# Altium PCB PCB.PcbDoc
Units mm, origin at the board's own origin, x right, y up, seen from the top; angles counter-clockwise.
Board outline 67.82 x 15.11 mm, 2 copper layers (Top Layer, Bottom Layer); 11 components, 6 nets, 26 pads, 0 vias.
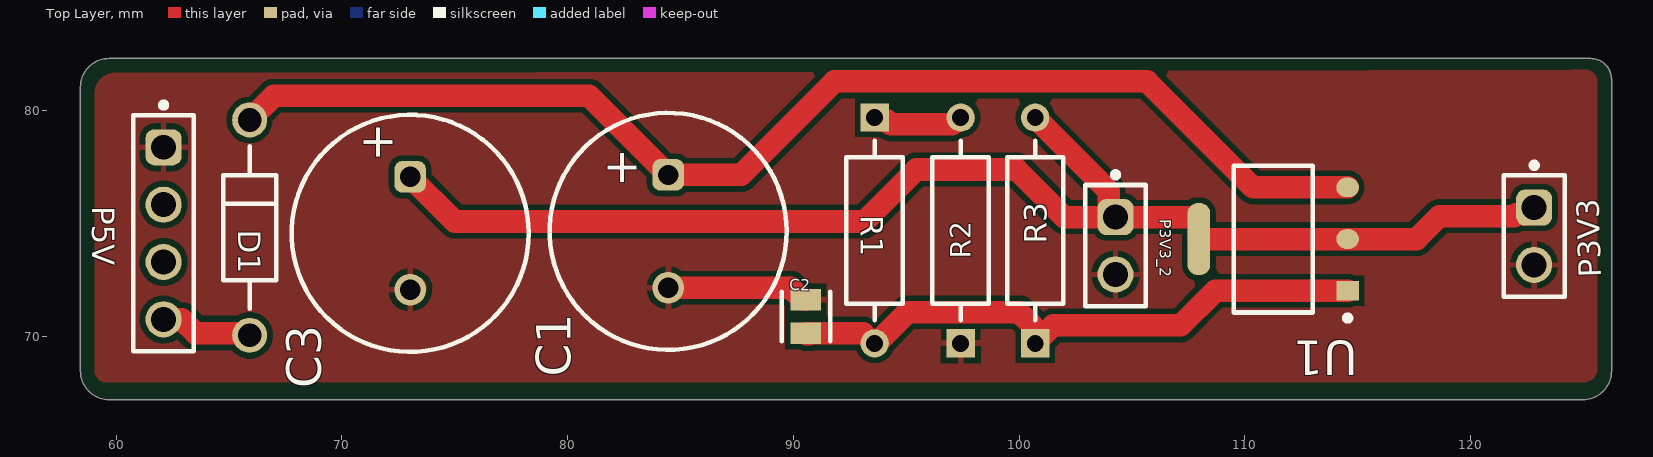
[diagram p0: Top Layer view]
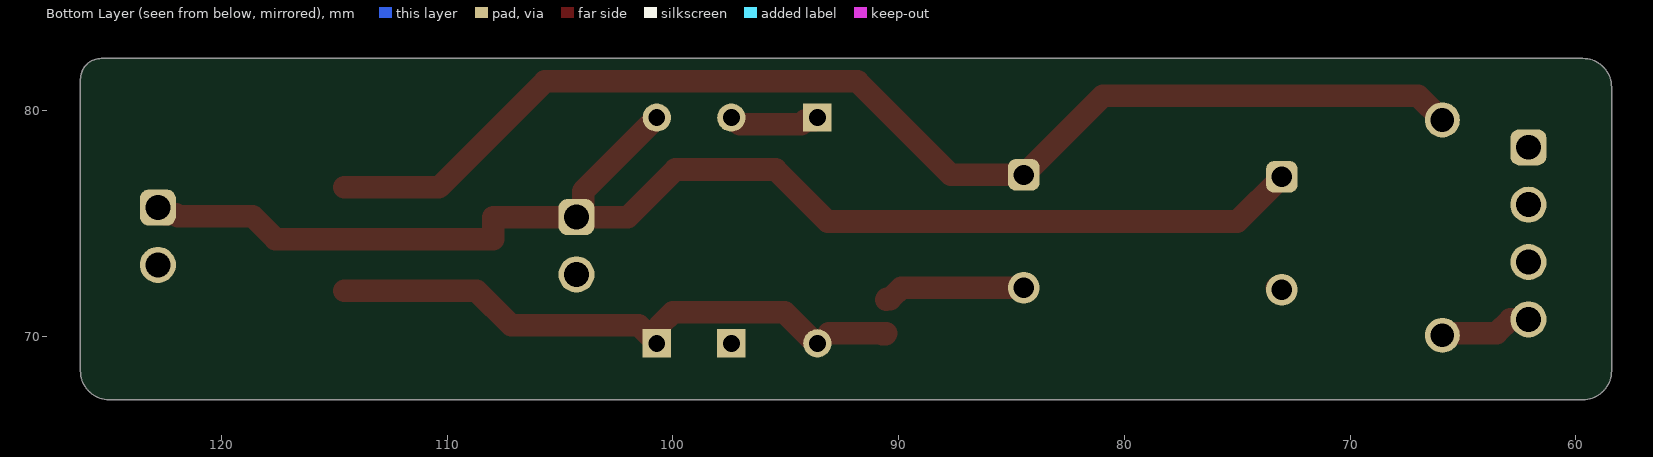
[diagram p1: Bottom Layer view, seen from below]
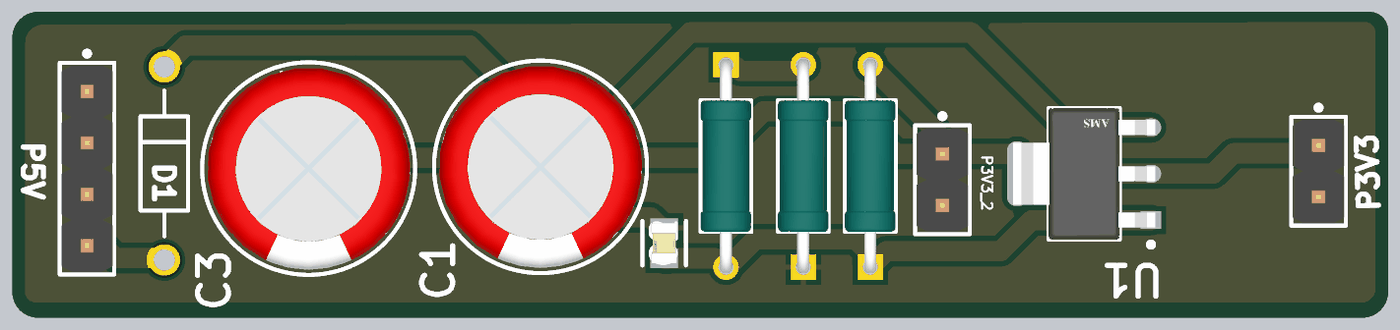
[diagram p2: 3D render of the assembled board from above, using the file's embedded part models]

## Layer stack, top to bottom
Top Solder: solder mask 0.0102, Solder Resist, Dk 3.5
Top Layer: signal copper 0.0356
Dielectric 1: dielectric 0.32, FR-4, Dk 4.8
Bottom Layer: signal copper 0.0356
Bottom Solder: solder mask 0.0102, Solder Resist, Dk 3.5

## Board outline
59.69,67.183 cw(c59.69,68.453) 58.42,68.453 58.42,81.026 cw(c59.69,81.026) 59.69,82.296 125.316,82.296 cw(c125.316,81.374) 126.238,81.374 126.238,68.453 cw(c124.968,68.453) 124.968,67.183

## Design rules (kind name [scope] priority, off if disabled: settings)
Clearance [All] p1: gap=0.254 ignorepadtopadclearanceinfootprint=FALSE
PolygonConnect [All] p1: connectstyle=Relief reliefconductorwidth=0.254 reliefentries=4 polygonreliefangle="90 Angle" airgapwidth=0.254
RoutingVias [All] p1: holewidth=0.711 width=1.27 viastyle="Through Hole" minholewidth=0.711 minwidth=1.27 maxholewidth=0.711 maxwidth=1.27
SolderMaskExpansion [All] p1: expansion=0.102 istentingtop=FALSE
SupplyNets "Schematic Supply Nets_2" [InNet('+3.3')] p1: voltage=0.000
SupplyNets "Schematic Supply Nets_1" [InNet('+5')] p2: voltage=0.000
SupplyNets "Schematic Supply Nets" [InNet('GND')] p3: voltage=0.000
Width [All] p1: maxlimit=1 minlimit=0.254 preferedwidth=0.254 minimp=50.000000 maximp=50.000000 favimp=50.000000
30 further rules are at their usual default settings.

## Components (designator, comment, footprint, x,y, rotation, side; value= is the part's Value field where it differs from the comment)
C1 "220µ" WCAP-ATUL_D10H25 84.455,74.636 r90 top locked
C2 "10nF" FP-C0805C-DN-MFG 90.551,70.866 r90 top value="10,000 pF"
C3 "220µ" WCAP-ATUL_D10H25 73.025,74.549 r90 top
D1 "1N5819RLG" ONSC-AXIAL_LEAD-2-59-10_P 65.913,74.803 r270 top
P3V3 "2.54mm" 61300211121 122.809,74.422 r270 top
P3V3_2 "2.54mm" 61300211121 104.267,74 r270 top
P5V "USB_Breakout_2.54mm" 61300411121 62.103,74.549 r270 top
R1 "510" FP-MRS25-MFG 93.599,74.676 r270 top
R2 "22" FP-MRS25-MFG 97.409,74.676 r90 top
R3 "330" FP-MRS25-MFG 100.711,74.676 r90 top
U1 "ams1117" FP-ams1117-IPC_C 111.252,74.295 r180 top

## Footprints (in the part's own frame and the unit in brackets; to place one, negate y for a bottom-side part, rotate by r counter-clockwise, add the part's x,y. Pads: shape width x height; smd on the part's side, far side on the other; paste and mask are expansions set on the pad)
61300211121 [mm] "Pin Header, pitch 2.54 mm, THT, Vertical, single row, 2p"
  rrect50% 1.6x1.6 hole 1.1: 1(-1.27,0)
  round 1.6 hole 1.1: 2(1.27,0)
  silkscreen extent -3.26,-1.34 2.69,1.34, body extent -2.54,-1.27 2.54,1.27, height 8.57
61300411121 [mm] "Pin Header, pitch 2.54 mm, THT, Vertical, single row, 4p"
  rrect50% 1.6x1.6 hole 1.1: 1(-3.81,0)
  round 1.6 hole 1.1: 2(-1.27,0) 3(1.27,0) 4(3.81,0)
  silkscreen extent -5.8,-1.34 5.23,1.34, body extent -5.08,-1.27 5.08,1.27, height 8.57
FP-ams1117-IPC_C [mm]
  rect 1.004x0.872 smd paste+0 mask+0: 1(-3.295,2.29)
  rrect100% 1.004x0.872 smd paste+0 mask+0: 2(-3.295,0) 3(-3.295,-2.29)
  rrect87% 1.004x3.182 smd paste+0 mask+0: 4(3.295,0)
  silkscreen extent -3.42,-3.25 1.75,3.62, body extent -3.9,-3.35 3.9,3.35, height 0.25
FP-C0805C-DN-MFG [mm]
  rect 0.95x1.35 smd paste+0 mask+0: 1(-0.75,0) 2(0.75,0)
  silkscreen extent -1.1,-1.07 1.1,1.07, body extent -1.4,-0.85 1.4,0.85, height 0.25
FP-MRS25-MFG [mm]
  rect 1.25x1.25 hole 0.75 paste-2539.97 mask+0: 1(-5,0)
  round 1.25 hole 0.75 paste-2539.97 mask+0: 2(5,0)
  silkscreen extent -3.97,-1.25 3.97,1.25, body extent -5.72,-1.35 5.72,1.35, height 0.25
ONSC-AXIAL_LEAD-2-59-10_P [mm] "AXIAL, 2-Leads, Diameter 2.35mm"
  round 1.55 hole 1.05: 1(-4.77,0) 2(4.77,0)
  silkscreen extent -3.6,-1.18 3.6,1.18
WCAP-ATUL_D10H25 [mm] "Aluminum Electrolytic Capacitors, 10x25mm"
  rrect50% 1.4x1.4 hole 0.9: 1(2.5,0)
  round 1.4 hole 0.9: 2(-2.5,0)
  silkscreen extent -5.25,-5.25 5.25,5.25, body extent -4.99,-5 5,5, height 25.31

## Part data
C1 C3: library part CMP-03913-54202247-1, "860040775010 Alum. Electrolytic Cap 220µF 63V 10mm Radial WCAP-ATUL; Lifetime 7000h +105°C", Capacitance=220µF, Case/Package=Radial, Leakage Current=138.6µA, Max Operating Temperature=105°C, Min Operating Temperature=-40°C, Ripple Current=1.1A, Tolerance=20%, Voltage Rating=63V, Diameter=10mm, Height=25mm, Height - Seated (Max)=26.4922mm, Impedance=185mΩ, Lead Pitch=5.0038mm, Length=25mm, Life (Hours)=7000hours, Material=Aluminium, Mount="Through Hole", NexarPartId=54202247, Packaging="Tape & Box (TB)", Pitch=5mm, Polarity=Polar, REACH SVHC=Unknown, RoHS=Compliant, Voltage Rating (DC)=63V
C2: library part CMP-2007-00259-2, "CAP CER 10000PF 200V X7R 0805", Capacitance="10,000 pF", Manufacturer=KEMET, Manufacturer Part Number=C0805C103K2RACTU, Package=C0805C-DN, Temperature="-55°C to +125°C", Temperature Characteristic=X7R, Temperature Coefficient=30ppm/°C, Temperature Range High=+125°C, Temperature Range Low=-55°C, Tolerance=0.1, Voltage Rating="200 V", Automotive=No, Category=Cap, ComponentLink2Description=Datasheet, ComponentLink2URL=https://content.kemet.com/datasheets/KEM_C1003_C0G_SMD.pdf, Device Class L1="Passive Components", Device Class L2=Capacitors, Device Class L3="Ceramic Capacitors", Digikey Description="CAP CER 10000PF 200V X7R 0805", Height=0.88mm, Ipc Land Pattern Name=CAPC200125X78, Lead Free=Yes, Material=Ceramic, Mouser Description="KEMET - C0805C103K2RACTU - CAP, MLCC, X7R, 10NF, 200V, 0805", Octopart=https://octopart.com/c0805c103k2ractu-kemet-9138347, RoHS=TRUE
D1: library part CMP-1055-00037-1, "Rectifier, 2-Pin Axial_Lead, Pb-Free, Tape and Reel", Manufacturer="On Semiconductor", ComponentLink1Description="Manufacturer URL", ComponentLink1URL=http://www.onsemi.com/, ComponentLink2Description=Datasheet, ComponentLink2URL=http://www.onsemi.cn/pub_link/Collateral/1N5817-D.PDF, ComponentLink3Description="Package Specification", ComponentLink3URL=http://www.onsemi.cn/pub_link/Collateral/59-10.PDF, Configuration=Single, DatasheetVersion="Rev. 10", IFSM Max (A)=25, Mounting Technology="Through Hole", PackageDescription="2-Pin, Axial Lead, Diameter 2.35 mm", PackageReference=AXIAL_LEAD-2-59-10, PackageVersion="Rev. U, 02/2005", Packing="Tape and Reel", PartNumber=1N5819RLG, RoHS=TRUE
P3V3 P3V3_2: library part CMP-1712-00002-6, Color=Black, Contact Resistance=20mΩ, Current Rating=3A, Max Operating Temperature=125°C, Min Operating Temperature=-40°C, Operating Supply Voltage=250V, Connector Type="Male Pin", Contact Gender=Male, Contact Material=Copper, Contact Mating Length=5.9944mm, Contact Plating=Gold, Gender=Male, Height=8.94mm, Housing Material=PBT, Lead Free="Lead Free", Lead Pitch=2.54mm, Mount="Through Hole", NexarPartId=20081794, Number of Contacts=2, Number of Pins=2, Number of Positions=2, Number of Rows=1, Orientation=Vertical, Packaging=Bulk, Pitch=2.54mm, REACH SVHC="No SVHC", RoHS=Compliant, Termination="Through Hole", Voltage Rating=250V
P5V: library part CMP-1502-01064-3, Color=Black, Contact Resistance=20mΩ, Current Rating=3A, Max Operating Temperature=105°C, Min Operating Temperature=-40°C, Operating Supply Voltage=250V, Connector Type="Male Pin", Contact Material=Copper, Contact Mating Length=5.9944mm, Contact Plating=Gold, Gender=Male, Height=8.89mm, Lead Free="Lead Free", Lead Pitch=2.54mm, Mount="Through Hole", NexarPartId=32855522, Number of Contacts=4, Number of Pins=4, Number of Positions=4, Number of Rows=1, Orientation=Vertical, Packaging=Bulk, Pitch=2.54mm, REACH SVHC=Unknown, RoHS=Compliant, Termination=Solder, Voltage Rating=250V
R1 R2 R3: library part CMP-00030-42757237-1, "MRS25000C1000FRP00 Resistor,  ± 1%, 600 mW, Axial Leaded, Metal Film (Thin Film), Professional", Case/Package=Axial, Max Operating Temperature=155°C, Max Power Dissipation=600mW, Min Operating Temperature=-55°C, Resistance=100Ω, Temperature Coefficient=50ppm/°C, Tolerance=1%, Voltage Rating=350V, Composition="Metal Film, Thin Film", Contact Plating=Tin, Diameter=2.5mm, Lead Diameter=600µm, Lead Free="Lead Free", Length=6.5mm, Military Standard=Not, Mount="Through Hole", NexarPartId=42757237, Number of Pins=2, Number of Terminations=2, Packaging="Tape & Reel (TR)", Power Rating=600mW, Radiation Hardening=No, REACH SVHC=Unknown, RoHS=Compliant, Schedule B="8533210090, 8533210090", Termination=Axial, Voltage Rating (DC)=350V, Width=2.5mm
U1: library part CMP-209535-000002-1, "1A LOW DROPOUT VOLTAGE REGULATOR", RoHS Compliant=Yes

## Nets (pads, with @x,y where several pads share a name; then routed paths per layer and width w, separated by ;. In a path a pad name is that pad's centre, name@x,y a point inside that pad or via, vN(x,y) a via of type N, cw(c..) or ccw(c..) an arc to the next point about the centre after c; other vN are vias at no path point)
+3.3: C3.1 P3V3.1 P3V3_2.1 R3.2 U1.2 U1.4 | length 59.9
  Top Layer w1: C3.1 75.001,75.073 93.14,75.073 95.444,77.377 99.882,77.377 101.989,75.27 P3V3_2.1 ; R3.2 103.967,76.42 103.967,75.57 P3V3_2.1 ; P3V3.1 122.509,75.392 122.004,75.392 121.923,75.311 118.618,75.311 117.602,74.295 U1.2 U1.4 107.957,75.268 107.955,75.27 P3V3_2.1
+5: D1.2 P5V.4 | length 3.3
  Top Layer w1: P5V.4@62.738,70.739 62.9,70.739 63.511,70.128 65.691,70.128 D1.2@65.786,70.033
GND: C1.2 C2.2 C3.2 P3V3.2 P3V3_2.2 P5V.1 R2.1 | length 6.8
  Top Layer w1: C3.2@73.025,71.922 C3.2@73.239,72.136 ; C1.2 89.881,72.136 90.376,71.641 90.526,71.641 C2.2 ; P3V3.2@122.698,73.041 P3V3.2
NetC1_1: C1.1 D1.1 U1.3 | length 54.2
  Top Layer w1: D1.1 66.985,80.645 80.946,80.645 C1.1 87.677,77.136 91.821,81.28 105.668,81.28 110.363,76.585 U1.3
NetC2_1: C2.1 R1.2 R3.1 U1.1 | length 26
  Top Layer w1: C2.1@90.726,70.091 90.576,70.091 C2.1 93.091,70.116 ; R1.2 93.667,69.676 95.046,71.055 100,71.055 100.586,70.469 100.586,69.801 R3.1 ; R3.1@100.836,69.801 101.504,70.469 107.152,70.469 108.688,72.005 U1.1
NetR1_1: R1.1 R2.2 | length 4.1
  Top Layer w1: R1.1 93.724,79.551 94.134,79.551 94.31,79.375 97.04,79.375 97.341,79.676 R2.2
pads on no net: P5V.2 P5V.3

## Polygon pours and split planes (outlines as drawn)
GND on Top Layer "GND_L01_P004" (solid, pour order 4): 66.294,81.661 59.944,81.661 ccw(c59.944,80.772) 59.055,80.772 59.055,68.453 ccw(c59.563,68.453) 59.563,67.945 124.968,67.945 ccw(c124.968,68.58) 125.603,68.58 125.603,81.28 ccw(c125.095,81.28) 125.095,81.788 124.46,81.788

## Silkscreen, mask and mechanical layers (free items; w line width, h text height)
Mechanical 1:
  lines w0.254: 58.42,68.453 ccw(c59.69,68.453) 59.69,67.183 115.316,67.183 124.968,67.183 ccw(c124.968,68.453) 126.238,68.453 126.238,81.374 ccw(c125.316,81.374) 125.316,82.296 59.69,82.296 ccw(c59.69,81.026) 58.42,81.026 58.42,77.978 58.42,68.453

## Text inside footprints (layer, text, board x,y; h text height)
C1: Top Overlay "+" at 83.058,76.581 h1.5 r90
C3: Top Overlay "+" at 72.263,77.724 h1.5 r90